# Altium PCB STLinkV3Convert.PcbDoc
Units mil, origin at the board's own origin, x right, y up, seen from the top; angles counter-clockwise.
Board outline 2760 x 1640 mil, 2 copper layers (Top Layer, Bottom Layer); 4 components, 19 nets, 64 pads, 12 vias.
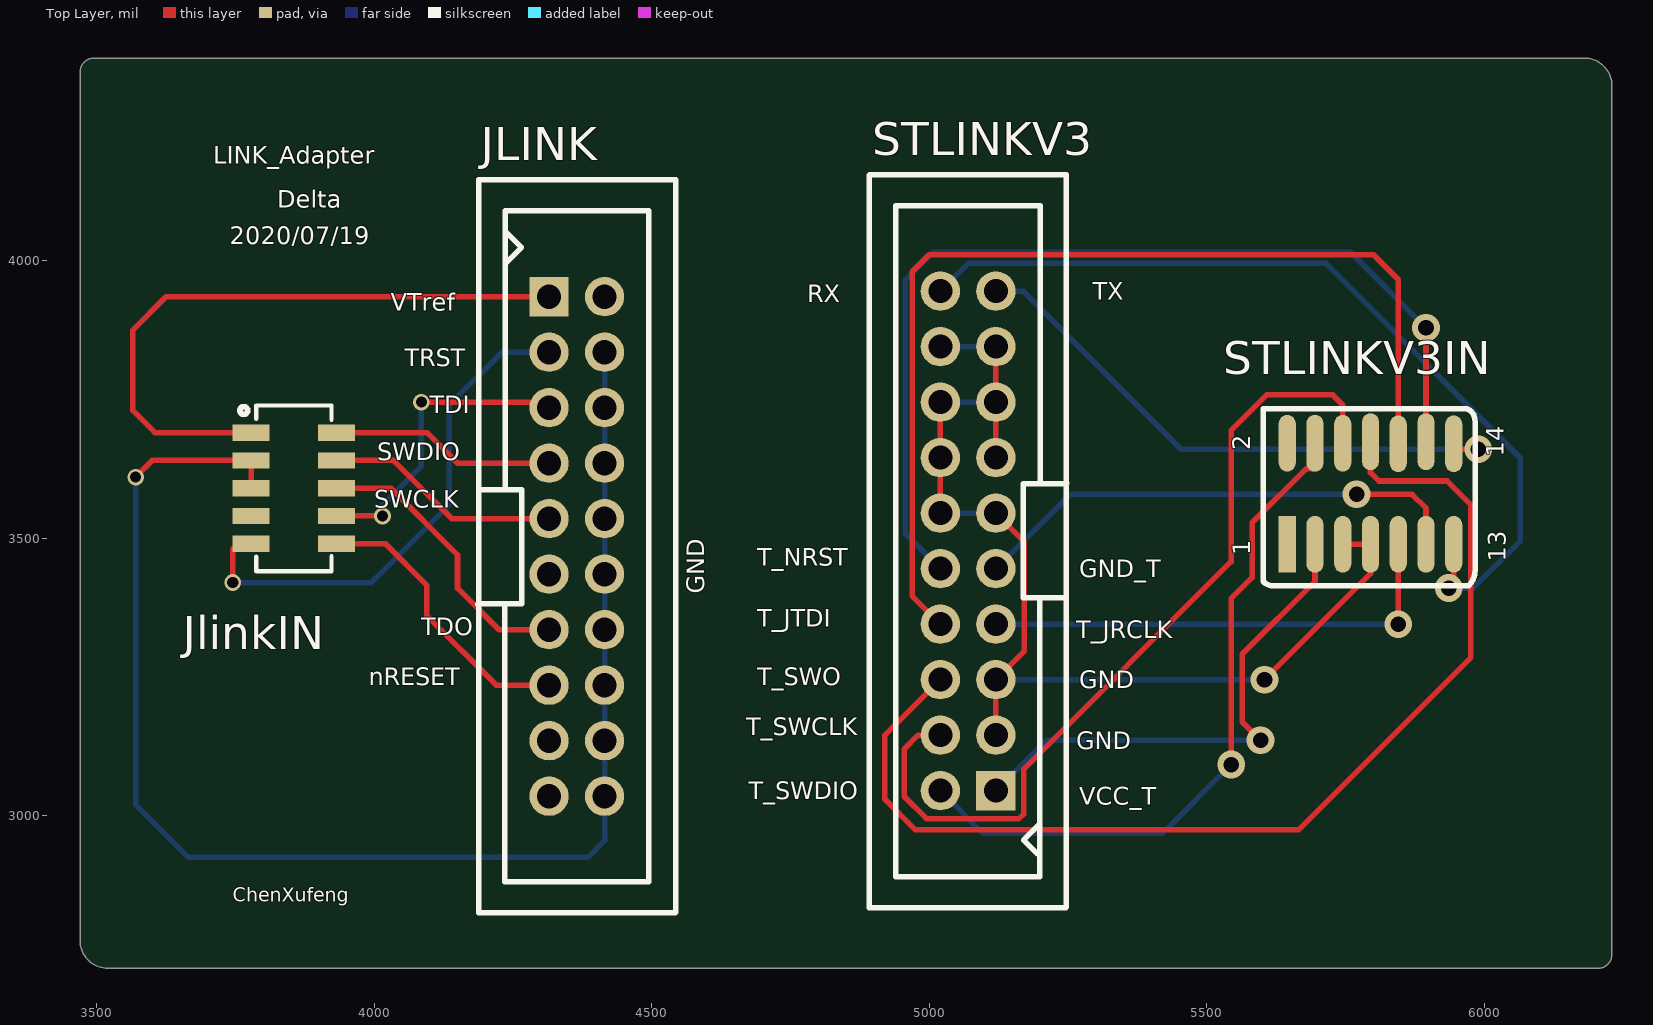
[diagram p0: Top Layer view]
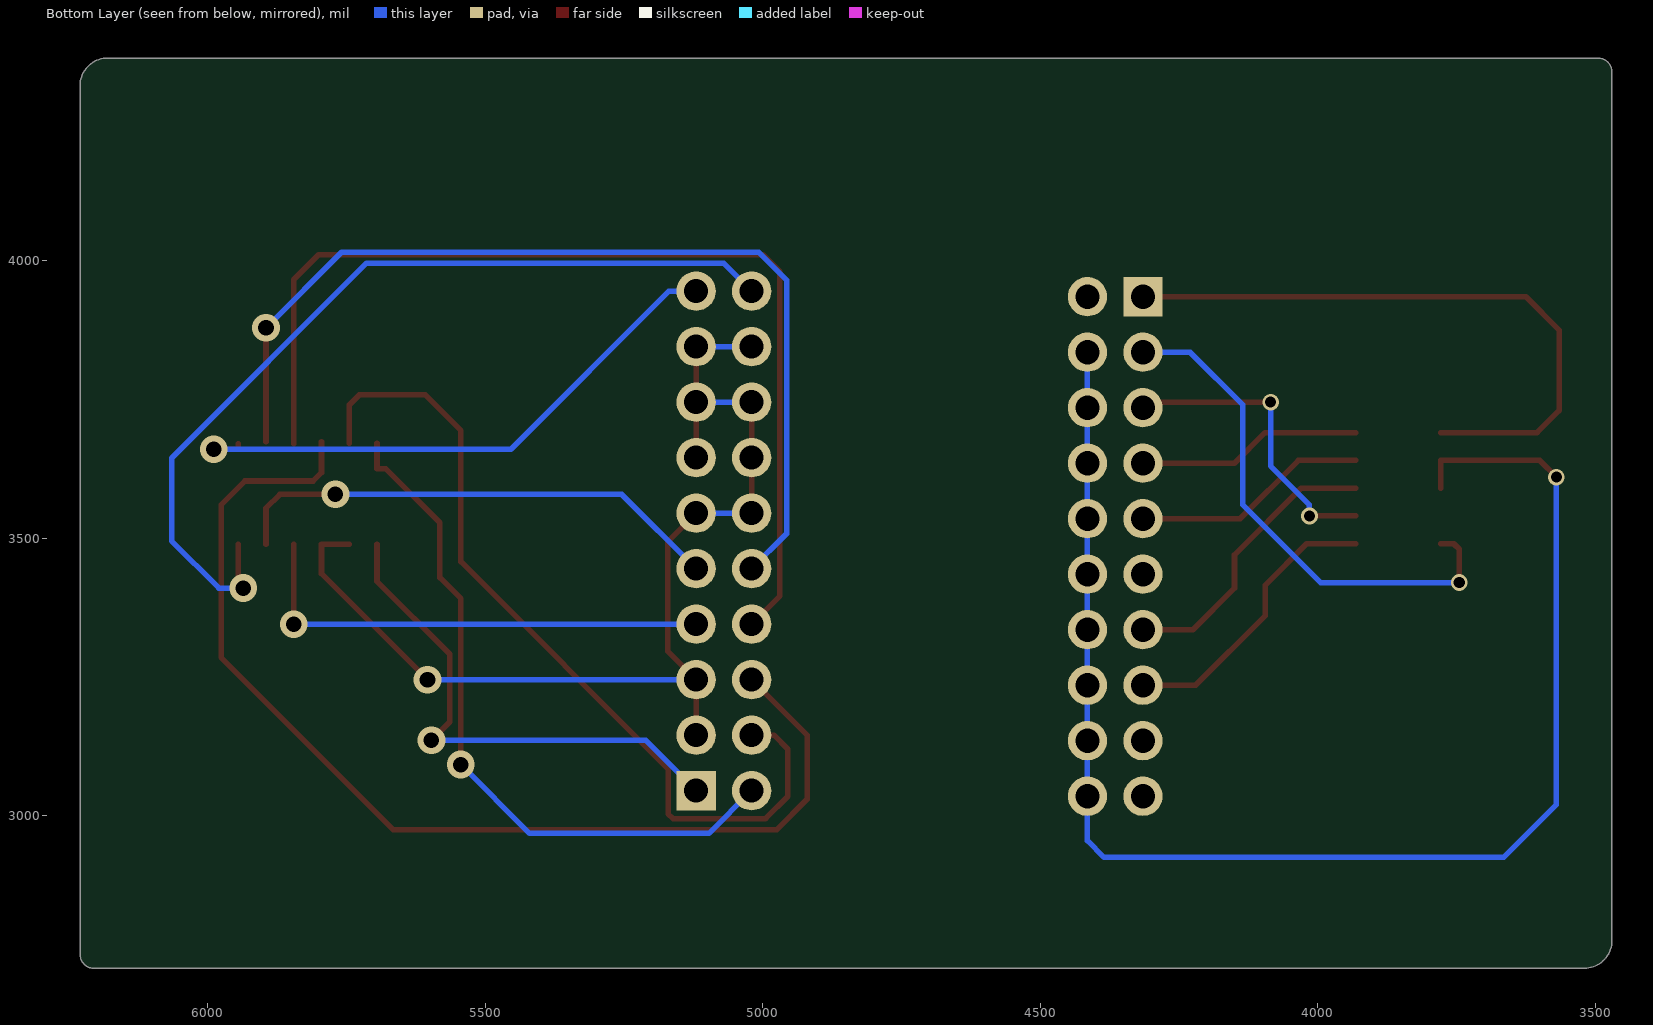
[diagram p1: Bottom Layer view, seen from below]

## Layer stack, top to bottom
Top Solder: solder mask 0.4, Solder Resist, Dk 3.5
Top Layer: signal copper 1.4
Dielectric 1: dielectric 12.6, FR-4, Dk 4.8
Bottom Layer: signal copper 1.4
Bottom Solder: solder mask 0.4, Solder Resist, Dk 3.5

## Board outline
3470,2775 ccw(c3520,2775) 3520,2725 6205,2725 ccw(c6205,2750) 6230,2750 6230,4315 ccw(c6180,4315) 6180,4365 3495,4365 ccw(c3495,4340) 3470,4340

## Design rules (kind name [scope] priority, off if disabled: settings)
Clearance [All] p1: gap=10 ignorepadtopadclearanceinfootprint=FALSE except(0: Arc-Hole Track-Hole SMDPad-Hole THPad-Hole Via-Hole Fill-Hole Poly-Hole Region-Hole Text-Hole)
PolygonConnect [All] p1: connectstyle=Relief reliefconductorwidth=10 reliefentries=4 polygonreliefangle="90 Angle" airgapwidth=10
RoutingVias [All] p1: holewidth=28 width=50 viastyle="Through Hole" minholewidth=28 minwidth=50 maxholewidth=28 maxwidth=50
SolderMaskExpansion [All] p1: expansion=4
Width [All] p1: maxlimit=10 minlimit=10 preferedwidth=10
30 further rules are at their usual default settings.

## Components (designator, comment, footprint, x,y, rotation, side; value= is the part's Value field where it differs from the comment)
JLINK "JTAG" IDC-TH_20P-P2.54-V-R2-C10-S2.54 4365,3485 r270 top
JlinkIN "Header 5X2" HDR-SMD_10P-P1.27-V-R2-C5-S5.00 3855,3590 r270 top
STLINKV3 "JTAG" IDC-TH_20P-P2.54-V-R2-C10-S2.54 5070,3495 r90 top
STLINKV3IN "Header 7X2" STDC14(SOIC) 5645,3488.9 r90 top

## Footprints (in the part's own frame and the unit in brackets; to place one, negate y for a bottom-side part, rotate by r counter-clockwise, add the part's x,y. Pads: shape width x height; smd on the part's side, far side on the other; paste and mask are expansions set on the pad)
HDR-SMD_10P-P1.27-V-R2-C5-S5.00 [mm]
  rect 0.75x1.7 smd: 1(-2.54,-1.95) 2(-2.54,1.95) 3(-1.27,-1.95) 4(-1.27,1.95) 5(0,-1.95) 6(0,1.95) 7(1.27,-1.95) 8(1.27,1.95) 9(2.54,-1.95) 10(2.54,1.95)
  silkscreen extent -3.78,-2.46 3.81,1.73
IDC-TH_20P-P2.54-V-R2-C10-S2.54 [mm]
  rect 1.8x1.8 hole 1.1: 1(-11.43,-1.27)
  round 1.8 hole 1.1: 2(-11.43,1.27) 3(-8.89,-1.27) 4(-8.89,1.27) 5(-6.35,-1.27) 6(-6.35,1.27) 7(-3.81,-1.27) 8(-3.81,1.27) 9(-1.27,-1.27) 10(-1.27,1.27) 11(1.27,-1.27) 12(1.27,1.27) 13(3.81,-1.27) 14(3.81,1.27) 15(6.35,-1.27) 16(6.35,1.27) 17(8.89,-1.27) 18(8.89,1.27) 19(11.43,-1.27) 20(11.43,1.27)
  silkscreen extent -16.79,-4.52 16.76,4.52
STDC14(SOIC) [mm]
  rect 2.6x0.78 smd: 1(0,0)
  oval 2.6x0.78 smd: 2(4.63,0) 3(0,-1.27) 4(4.63,-1.27) 5(0,-2.54) 6(4.63,-2.54) 7(0,-3.81) 8(4.7,-3.81) 9(0,-5.08) 10(4.6,-5.08) 11(0,-6.35) 12(4.7,-6.35) 13(0,-7.62) 14(4.6,-7.62)
  silkscreen extent -1.9,-8.6 6.2,1.1

## Part data
JLINK STLINKV3: BOM_Manufacturer="Nextronics Engineering", BOM_Manufacturer Part=Z-231011020106, BOM_Supplier=LCSC, BOM_Supplier Part=C221051, Contributor=LCSC, spicePre=C, spiceSymbolName=Z-231011020106
JlinkIN: "Header, 5-Pin, Dual row", LatestRevisionDate=17-Jul-2002, LatestRevisionNote="Re-released for DXP Platform.", Publisher="Altium Limited"
STLINKV3IN: "Header, 7-Pin, Dual row", LatestRevisionDate=17-Jul-2002, LatestRevisionNote="Re-released for DXP Platform.", Publisher="Altium Limited"

## Via types
v1: diameter 50, hole 28, Top Layer to Bottom Layer, 8 vias
v2: diameter 30, hole 20, Top Layer to Bottom Layer, 4 vias

## Nets (pads, with @x,y where several pads share a name; then routed paths per layer and width w, separated by ;. In a path a pad name is that pad's centre, name@x,y a point inside that pad or via, vN(x,y) a via of type N, cw(c..) or ccw(c..) an arc to the next point about the centre after c; other vN are vias at no path point)
GND: JLINK.4 JLINK.6 JLINK.8 JLINK.10 JLINK.12 JLINK.14 JLINK.16 JLINK.18 JLINK.20 JlinkIN.3 JlinkIN.5 | length 2637.4
  Top Layer w10: v2(3570,3610) 3600,3640 JlinkIN.3 JlinkIN.5
  Bottom Layer w10: v2(3570,3610) 3570,3020 3665,2925 4385,2925 4415,2955 JLINK.20 JLINK.18 JLINK.16 JLINK.14 JLINK.12 JLINK.10 JLINK.8 JLINK.6 JLINK.4
GND1: STLINKV3.3 STLINKV3.5 STLINKV3.11 STLINKV3.12 STLINKV3.13 STLINKV3.14 STLINKV3.15 STLINKV3.16 STLINKV3.17 STLINKV3.18 STLINKV3IN.5 STLINKV3IN.7 | length 1999.3
  Top Layer w10: STLINKV3.12 STLINKV3.14 STLINKV3.16 ; STLINKV3.3 STLINKV3.5 5171,3296 5171,3494 STLINKV3.11 ; STLINKV3.13 STLINKV3.15 STLINKV3.17 ; v1(5604,3245) 5795,3436 STLINKV3IN.7 STLINKV3IN.5
  Bottom Layer w10: STLINKV3.12 STLINKV3.11 ; STLINKV3.16 STLINKV3.15 ; STLINKV3.18 STLINKV3.17 ; STLINKV3.5 v1(5604,3245)
GND_T: STLINKV3.9 STLINKV3IN.11 | length 906
  Top Layer w10: v1(5770,3579) 5870,3579 5895,3554 STLINKV3IN.11
  Bottom Layer w10: STLINKV3.9 5254,3579 v1(5770,3579)
nRESET: JLINK.15 JlinkIN.10 | length 521.1
  Top Layer w10: JlinkIN.10 4020,3490 4095,3415 4095,3360 4220,3235 JLINK.15
SWCLK: JLINK.9 JlinkIN.4 | length 426.7
  Top Layer w10: JlinkIN.4 4035,3640 4140,3535 JLINK.9
SWDIO: JLINK.7 JlinkIN.2 | length 406
  Top Layer w10: JlinkIN.2 4095,3690 4150,3635 JLINK.7
T_JRCLK: STLINKV3.7 STLINKV3IN.9 | length 868.9
  Top Layer w10: v1(5845,3345) STLINKV3IN.9
  Bottom Layer w10: STLINKV3.7 v1(5845,3345)
T_JTDI: STLINKV3.8 STLINKV3IN.10 | length 1859.6
  Top Layer w10: STLINKV3.8 4969,3396 4969,3980 5000,4011 5800,4011 5845,3966 STLINKV3IN.10
T_NRST: STLINKV3.10 STLINKV3IN.12 | length 1766.6
  Top Layer w10: STLINKV3IN.12 v1(5895,3879)
  Bottom Layer w10: STLINKV3.10 4957,3508 4957,3965 5007.43,4015.43 5758.57,4015.43 v1(5895,3879)
T_SWCLK: STLINKV3.4 STLINKV3IN.6 | length 1545.6
  Top Layer w10: STLINKV3.4 4980,3145 4955,3120 4955,3034.57 4995,2994.57 5161.65,2994.57 5170.43,3003.35 5170.43,3084.43 5543.73,3457.73 5543.73,3693.73 5608,3758 5727,3758 5745,3740 STLINKV3IN.6
T_SWDIO: STLINKV3.2 STLINKV3IN.4 | length 1258.4
  Top Layer w10: v1(5544,3092) 5544,3391.18 5581.82,3429 5581.82,3527.82 5679,3625 5695,3625 STLINKV3IN.4
  Bottom Layer w10: STLINKV3.2 5097,2968 5420,2968 v1(5544,3092)
T_SWO: STLINKV3.6 STLINKV3IN.8 | length 2000.2
  Top Layer w10: STLINKV3.6 4920,3145 4920,3029.57 4975,2974.57 5665.57,2974.57 5976,3285 5976,3560 5933,3603 5810,3603 5795,3618 STLINKV3IN.8
T_VCC: STLINKV3.1 STLINKV3IN.3 | length 935.5
  Top Layer w10: v1(5597,3136) 5564,3169 5564,3291 5695,3422 STLINKV3IN.3
  Bottom Layer w10: STLINKV3.1 5211,3136 v1(5597,3136)
T_VCP_RX: STLINKV3.20 STLINKV3IN.13 | length 1607.3
  Top Layer w10: v1(5936,3410) 5945,3419 STLINKV3IN.13
  Bottom Layer w10: STLINKV3.20 5070.43,3995.43 5713.57,3995.43 6065,3644 6065,3495 5980,3410 v1(5936,3410)
T_VCP_TX: STLINKV3.19 STLINKV3IN.14 | length 1041.1
  Top Layer w10: STLINKV3IN.14 5945,3660 v1(5989,3660)
  Bottom Layer w10: STLINKV3.19 5169,3945 5454,3660 v1(5989,3660)
TDI: JLINK.5 JlinkIN.8 | length 551.4
  Top Layer w10: JlinkIN.8 v2(4015,3540) ; v2(4085,3745) 4305,3745 JLINK.5
  Bottom Layer w10: v2(4015,3540) 4015,3560 4085,3630 v2(4085,3745)
TDO: JLINK.13 JlinkIN.6 | length 524
  Top Layer w10: JlinkIN.6 4030,3590 4150,3470 4150,3410 4225,3335 JLINK.13
TRST: JLINK.3 JlinkIN.9 | length 944.7
  Top Layer w10: v2(3745,3420) 3745,3480 3755,3490 JlinkIN.9
  Bottom Layer w10: v2(3745,3420) 3995,3420 4135,3560 4135,3740 4230,3835 JLINK.3
VTref: JLINK.1 JlinkIN.1 | length 1149.6
  Top Layer w10: JlinkIN.1 3605,3690 3565,3730 3565,3875 3625,3935 JLINK.1
pads on no net: JLINK.2 JLINK.11 JLINK.17 JLINK.19 JlinkIN.7 STLINKV3IN.1 STLINKV3IN.2

## Silkscreen, mask and mechanical layers (free items; w line width, h text height)
Top Overlay:
  text "LINK_Adapter" at 3710,4175 h31.5
  text "Delta" at 3825,4095 h31.5
  text "2020/07/19" at 3740,4030 h31.5
  text "TX" at 5295,3930 h31.5
  text "RX" at 4780,3925 h31.5
  text "VTref" at 4030,3910 h31.5
  text "TRST" at 4055,3810 h31.5
  text "TDI" at 4100,3725 h31.5
  text "SWDIO" at 4005,3640 h31.5
  text "SWCLK" at 4000,3555 h31.5
  text "T_NRST" at 4690,3450 h31.5
  text "GND_T" at 5270,3430 h31.5
  text "GND" at 4595,3400 h31.5 r90
  text "T_JTDI" at 4690,3340 h31.5
  text "TDO" at 4085,3325 h31.5
  text "T_JRCLK" at 5265,3320 h31.5
  text "nRESET" at 3990,3235 h31.5
  text "T_SWO" at 4690,3235 h31.5
  text "GND" at 5270,3230 h31.5
  text "T_SWCLK" at 4670,3145 h31.5
  text "GND" at 5265,3120 h31.5
  text "T_SWDIO" at 4675,3030 h31.5
  text "VCC_T" at 5270,3020 h31.5
  text "ChenXufeng" at 3745,2845 h25
Mechanical 1:
  the board outline again, w10

## Text inside footprints (layer, text, board x,y; h text height)
STLINKV3IN: Top Overlay "14" at 6034.76,3646.38 h31.5 r90; Top Overlay "13" at 6038.7,3457.4 h31.5 r90; Top Overlay "2" at 5578.07,3658.19 h31.5 r90; Top Overlay "1" at 5578.07,3469.21 h31.5 r90